# EAGLE board miavita (EAGLE 5.12)
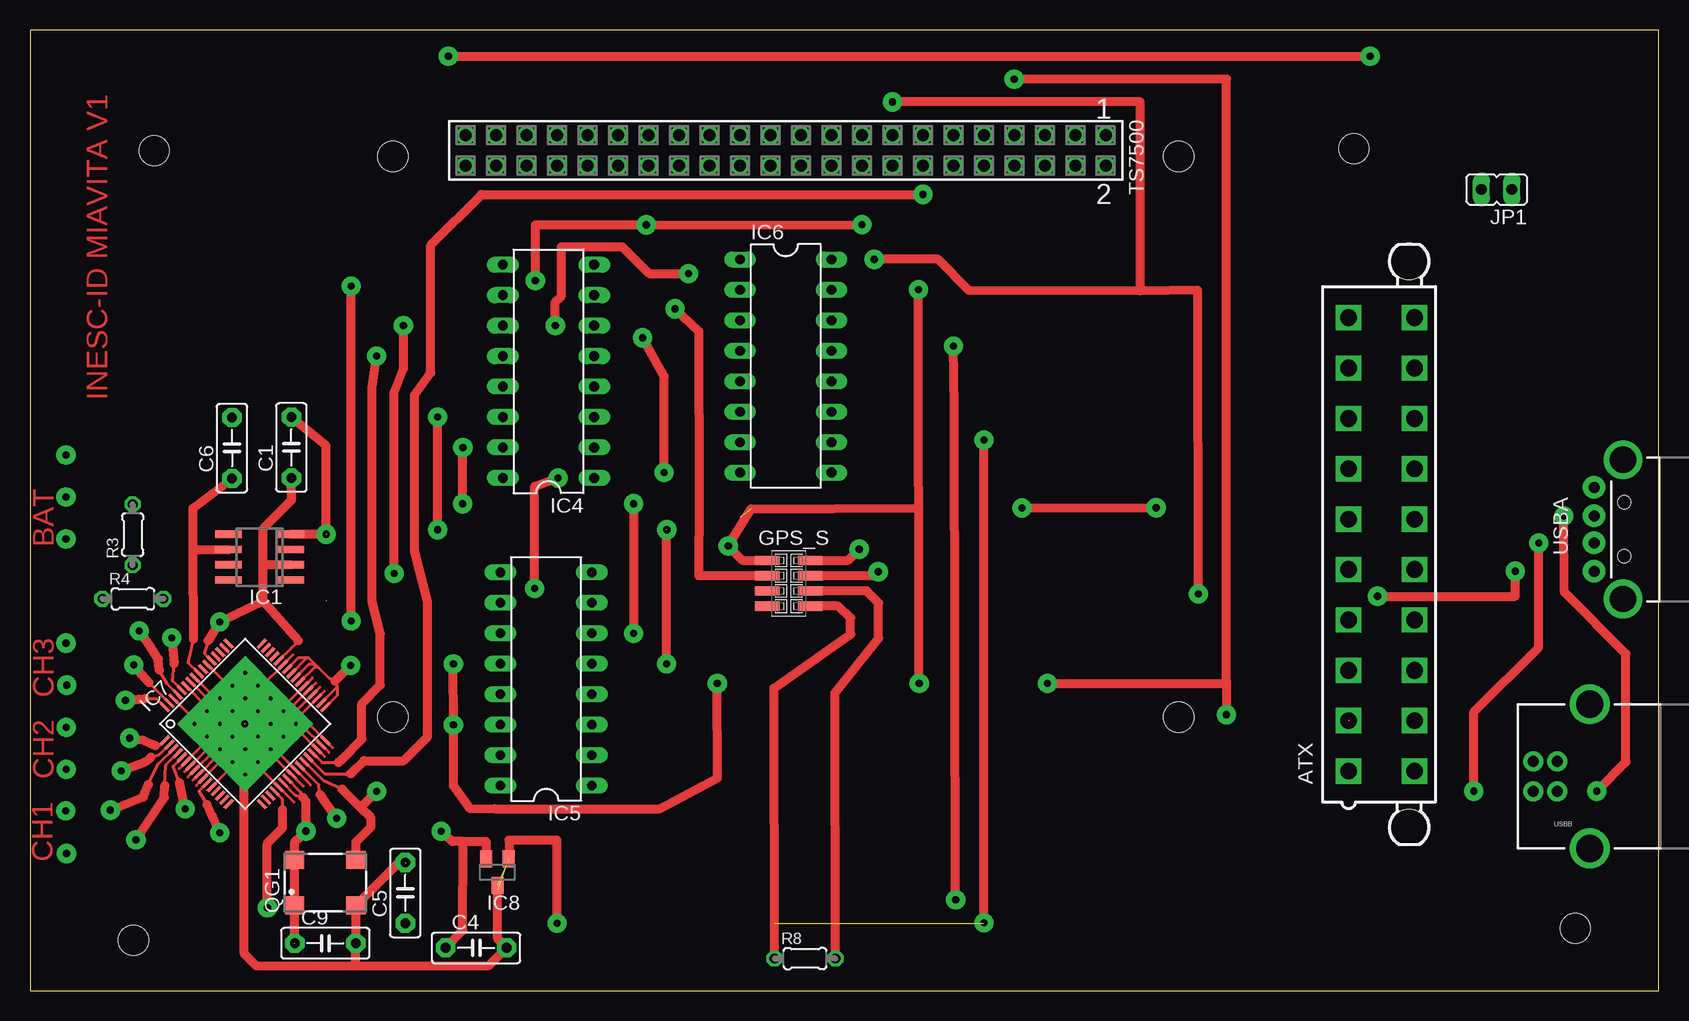
[diagram p0: board, top side]
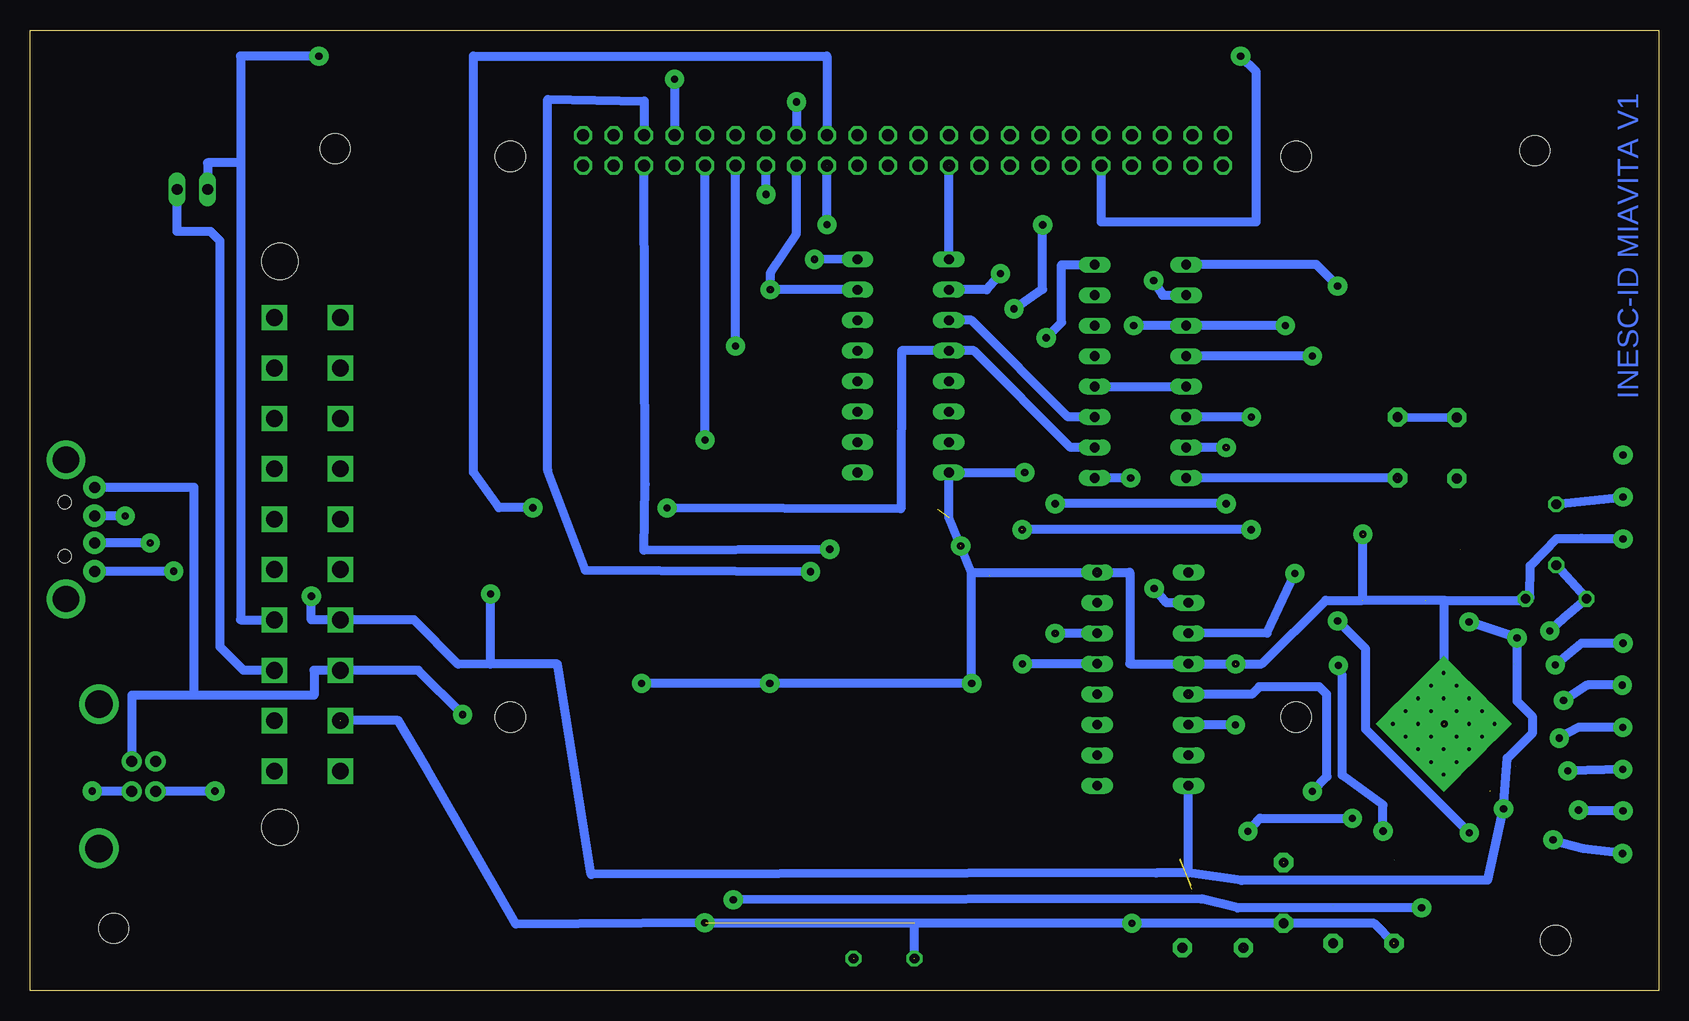
[diagram p1: board, bottom side, seen from below]

Size 135.78 x 80.09 mm. Coordinates in mm from the lower left corner, seen from the top.
Outline: 0,0 135.78,0 135.76,80.09 0,80.09 0,0
Copper layers (1*16): Top 0.035mm / dielectric 1.5mm / Bottom 0.035mm
Design rules "default *": minimum track width 0.75mm, minimum drill 0.5mm, track to track 0.4mm, track to pad 0.4mm, pad to pad 0.4mm, via to via 0.4mm, smd to smd 8mil, copper to edge 40mil, drill to drill 8mil, minimum pad ring 10mil, minimum via ring 0.5mm, stop-mask expansion 0.5mm, vias tented up to drill 0mil, thermal gap 10mil
Holes 2.5 mm at 30.25,69.55 95.75,69.55 95.75,22.8 30.25,22.8 8.62,4.2 128.8,5.2 110.35,70.2 10.35,70.02
tKeepout: area 0,26 to 0,26

## Footprints (pad centres in the part's own frame; a part is rotated, then mirrored left to right if it is on the bottom)
5566-20 = drill 1.4 square: 1 18.9,-2.75; 2 14.7,-2.75; 3 10.5,-2.75; 4 6.3,-2.75; 5 2.1,-2.75; 6 -2.1,-2.75; 7 -6.3,-2.75; 8 -10.5,-2.75; 9 -14.7,-2.75; 10 -18.9,-2.75; 11 18.9,2.75; 12 14.7,2.75; 13 10.5,2.75; 14 6.3,2.75; 15 2.1,2.75; 16 -2.1,2.75; 17 -6.3,2.75; 18 -10.5,2.75; 19 -14.7,2.75; 20 -18.9,2.75 | hole 3: 23.6,2.29; -23.6,2.29
C5B2.5 = drill 0.813 pad 1.6 octagon: 1 -2.54,0; 2 2.54,0
1296-08 = smd 0.76 x 2.05: 1 -1.905,-1.78; 2 -1.905,1.78; 3 -0.635,-1.78; 4 -0.635,1.78; 5 0.635,-1.78; 6 0.635,1.78; 7 1.905,-1.78; 8 1.905,1.78
SO08 = smd 0.6 x 2.2: 1 -1.905,-2.6; 2 -0.635,-2.6; 3 0.635,-2.6; 4 1.905,-2.6; 5 1.905,2.6; 6 0.635,2.6; 7 -0.635,2.6; 8 -1.905,2.6
DIL16 = drill 0.813 long: 1 -8.89,-3.81; 2 -6.35,-3.81; 3 -3.81,-3.81; 4 -1.27,-3.81; 5 1.27,-3.81; 6 3.81,-3.81; 7 6.35,-3.81; 8 8.89,-3.81; 9 8.89,3.81; 10 6.35,3.81; 11 3.81,3.81; 12 1.27,3.81; 13 -1.27,3.81; 14 -3.81,3.81; 15 -6.35,3.81; 16 -8.89,3.81
HTQFP-64-PAP = smd 1 x 0.25: 1 -5.7,3.75; 2 -5.7,3.25; 3 -5.7,2.75; 4 -5.7,2.25; 5 -5.7,1.75; 6 -5.7,1.25; 7 -5.7,0.75; 8 -5.7,0.25; 9 -5.7,-0.25; 10 -5.7,-0.75; 11 -5.7,-1.25; 12 -5.7,-1.75; 13 -5.7,-2.25; 14 -5.7,-2.75; 15 -5.7,-3.25; 16 -5.7,-3.75; 33 5.7,-3.75; 34 5.7,-3.25; 35 5.7,-2.75; 36 5.7,-2.25; 37 5.7,-1.75; 38 5.7,-1.25; 39 5.7,-0.75; 40 5.7,-0.25; 41 5.7,0.25; 42 5.7,0.75; 43 5.7,1.25; 44 5.7,1.75; 45 5.7,2.25; 46 5.7,2.75; 47 5.7,3.25; 48 5.7,3.75 | smd 0.25 x 1: 17 -3.75,-5.7; 18 -3.25,-5.7; 19 -2.75,-5.7; 20 -2.25,-5.7; 21 -1.75,-5.7; 22 -1.25,-5.7; 23 -0.75,-5.7; 24 -0.25,-5.7; 25 0.25,-5.7; 26 0.75,-5.7; 27 1.25,-5.7; 28 1.75,-5.7; 29 2.25,-5.7; 30 2.75,-5.7; 31 3.25,-5.7; 32 3.75,-5.7; 49 3.75,5.7; 50 3.25,5.7; 51 2.75,5.7; 52 2.25,5.7; 53 1.75,5.7; 54 1.25,5.7; 55 0.75,5.7; 56 0.25,5.7; 57 -0.25,5.7; 58 -0.75,5.7; 59 -1.25,5.7; 60 -1.75,5.7; 61 -2.25,5.7; 62 -2.75,5.7; 63 -3.25,5.7; 64 -3.75,5.7 | drill 0.3 pad 2 square: EXP1 -3,3; EXP2 -1.5,3; EXP3 0,3; EXP4 1.5,3; EXP5 3,3; EXP6 -3,1.5; EXP7 -1.5,1.5; EXP8 0,1.5; EXP9 1.5,1.5; EXP10 3,1.5; EXP11 -3,0; EXP12 -1.5,0; EXP13 0,0; EXP14 1.5,0; EXP15 3,0; EXP16 -3,-1.5; EXP17 -1.5,-1.5; EXP18 0,-1.5; EXP19 1.5,-1.5; EXP20 3,-1.5; EXP21 -3,-3; EXP22 -1.5,-3; EXP23 0,-3; EXP24 1.5,-3; EXP25 3,-3
SOT23 = smd 1 x 1.4: 1 -0.95,-1.1; 2 0.95,-1.1; 3 0,1.1
JP1 = drill 0.914 long: 1 0,-1.27; 2 0,1.27
SM77H = smd 1.6 x 1.5: 1 -2.55,-1.9; 2 2.55,-1.9; 3 2.55,1.9; 4 -2.55,1.9
0204/5 = drill 0.813 octagon: 1 -2.54,0; 2 2.54,0
SSW-122-02-S-D = drill 1 pad 1.5 octagon: 1 -26.67,-1.27; 2 -26.67,1.27; 3 -24.13,-1.27; 4 -24.13,1.27; 5 -21.59,-1.27; 6 -21.59,1.27; 7 -19.05,-1.27; 8 -19.05,1.27; 9 -16.51,-1.27; 10 -16.51,1.27; 11 -13.97,-1.27; 12 -13.97,1.27; 13 -11.43,-1.27; 14 -11.43,1.27; 15 -8.89,-1.27; 16 -8.89,1.27; 17 -6.35,-1.27; 18 -6.35,1.27; 19 -3.81,-1.27; 20 -3.81,1.27; 21 -1.27,-1.27; 22 -1.27,1.27; 23 1.27,-1.27; 24 1.27,1.27; 25 3.81,-1.27; 26 3.81,1.27; 27 6.35,-1.27; 28 6.35,1.27; 29 8.89,-1.27; 30 8.89,1.27; 31 11.43,-1.27; 32 11.43,1.27; 33 13.97,-1.27; 34 13.97,1.27; 35 16.51,-1.27; 36 16.51,1.27; 37 19.05,-1.27; 38 19.05,1.27; 39 21.59,-1.27; 40 21.59,1.27; 41 24.13,-1.27; 42 24.13,1.27; 43 26.67,-1.27; 44 26.67,1.27
USB-A-H = drill 0.914 pad 1.88 round: D+ 2.4,1.127; D- 2.4,-1.127; GND 2.4,3.5; VBUS 2.4,-3.5 | drill 2.2 round: GND2 0,-5.8; GND3 0,5.8 | hole 1.1: -0.1,2.25; -0.1,-2.25
USB-B-PTH = drill 0.914 pad 1.676 round: D+ 0,1.25; D- 1.981,1.25; GND 0,-1.25; VBUS 1.981,-1.25 | drill 2.286 round: S1 -2.718,-6.02; S2 -2.718,6.02

## Placement (x,y rotation side)
ATX  5566-20  [5566-20]  112.66,37.2 270 top
C1  1uF  [C5B2.5]  21.79,45.29 90 top
C4  10uF  [C5B2.5]  37.18,3.56 0 top
C5  10uF  [C5B2.5]  31.29,8.14 90 top
C6  10uF  [C5B2.5]  16.84,45.23 90 top
C9  0.1uF  [C5B2.5]  24.62,3.96 0 top
GPS_S  1296-T08  [1296-08]  63.25,33.96 270 top
IC1  REF02D  [SO08]  19.15,36.15 90 top
IC4  4572N  [DIL16]  43.22,51.63 90 top
IC5  74AC590N  [DIL16]  43.02,25.98 90 top
IC6  74LS157N  [DIL16]  63,52.08 270 top
IC7  ADS1278  [HTQFP-64-PAP]  17.94,22.24 45 top
IC8  [SOT23]  38.96,9.88 180 top
JP1  [JP1]  122.26,66.8 90 top
QG1  SM77H  [SM77H]  24.62,9.01 0 top
R3  5k  [0204/5]  8.56,38.01 90 top
R4  1k  [0204/5]  8.57,32.67 0 top
R8  100k  [0204/5]  64.61,2.68 0 top
TS7500  SSW-122-02-S-D  [SSW-122-02-S-D]  63,70.05 180 top
USBA  USB-A-H  [USB-A-H]  132.79,38.46 180 top
USBB  USBPTH  [USB-B-PTH]  127.3,17.88 180 top

## Library data of the parts
ATX = con-molex; OC_FARNELL: unknown; OC_NEWARK: unknown
C1 C4-C6 C9 = capacitor-wima
GPS_S = con-leotronics; OC_FARNELL: unknown; OC_NEWARK: unknown
IC1 = linear
IC4 = 45xx
IC5 IC6 = 74xx-eu
IC7 = texas; MPN: ADS1278IPAPT; OC_FARNELL: 1603419; OC_NEWARK: 50M8811
IC8 = v-reg
JP1 = jumper
QG1 = crystal; OC_FARNELL: unknown; OC_NEWARK: unknown
R3 R4 = rcl
R8 = resistor
TS7500 = con-samtec; MPN: SSW-122-02-S-D; OC_FARNELL: unknown; OC_NEWARK: 11P9673
USBA USBB = SparkFun

## Nets
2.5V: C6.1 IC1.6 IC7.56
+1V8: C4.1 IC7.26 IC8.2
+3V3: ATX.2 C5.1 C9.1 GPS_S.8 IC7.22 IC7.23 IC7.33 IC7.34 IC7.39 IC7.40 IC7.41 IC7.42 IC8.3 QG1.1 QG1.4 R8.1 TS7500.10
+5V: ATX.4 C1.1 IC1.2 IC4.16 IC5.16 IC6.16 IC7.5 IC7.44 IC7.53 IC7.60 TS7500.15 USBA.GND
ADC_DATA: IC7.20 TS7500.12
CONT_144: IC4.3 IC6.3
CONT_RST: IC4.1 IC5.10
DR_INT: IC4.2 IC6.4 TS7500.17
FIRST_ADC_INT: IC4.11 IC5.11 IC6.2
GND: ATX.3 C1.2 C4.2 C5.2 C6.2 C9.2 GPS_S.1 IC1.4 IC4.8 IC5.8 IC5.12 IC5.14 IC6.8 IC6.15 IC7.6 IC7.7 IC7.8 IC7.9 IC7.10 IC7.12 IC7.21 IC7.24 IC7.25 IC7.30 IC7.31 IC7.32 IC7.35 IC7.36 IC7.37 IC7.38 IC7.43 IC7.54 IC7.57 IC7.58 IC7.59 IC7.62 IC8.1 QG1.2 R4.2 TS7500.7 TS7500.16 USBA.VBUS USBB.GND
GPS_PPS: GPS_S.3 IC4.10 TS7500.18
N$1: IC6.1 TS7500.26
N$2: IC4.15 IC5.6
N$3: IC4.14 IC5.5
N$4: IC4.9 IC7.11
N$5: IC4.4 IC4.13
N$6: ATX.14 JP1.2 TS7500.36
N$7: IC4.12 IC7.29
N$8: IC7.3
N$9: ATX.13 JP1.1
N$10: IC7.4
N$11: IC7.1
N$12: IC7.61 R3.1 R4.1
N$13: USBA.D+ USBB.D-
N$14: IC7.63
N$17: IC5.13 IC7.27 QG1.3
N$18: USBA.D- USBB.D+
N$19: R3.2
N$29: IC7.2
N$34: IC7.64
N$42: GPS_S.2 TS7500.6
N$43: GPS_S.4 TS7500.5
N$44: GPS_S.6 R8.2
SPI_CLOCK: IC7.28 TS7500.14

## Tracks (layer width: path | path; a pad name or v marks a point on that pad's centre or on a via)
2.5V  (1 unrouted)
  Top 0.1: IC1.6 16.5,37.05
  Top 0.25: IC7.56 13.2,27.33 13.62,29.3
  Top 0.75: 13.62,29.3 13.6,36.6 | 13.6,36.6 13.6,36.77 IC1.6 | C6.1 13.6,40.22 13.6,36.6
+1V8  (via drill 0.6)  (1 unrouted)
  Top 0.25: IC7.26 24.07,17.17 24.18,16.35
  Top 0.75: 24.18,16.35 24.65,15.65 v25.55,14.38 | v34.27,13.28 35.19,12.44 36.08,12.44 36.09,12.44 | 34.64,3.58 36.08,5.01 36.09,12.44 | IC8.2 38.01,12.44 36.09,12.44
  Bottom 0.75: v34.27,13.28 33.25,14.38 v25.55,14.38
+3V3  (via drill 0.5, 0.6)  (7 unrouted)
  Top 0.1: 22.75,16.07 22.5,16.05
  Top 0.25: 22.57,16.55 IC7.23 | 22.57,16.55 22.75,16.07 22.23,16.23 22.16,16.25 IC7.22 | 22.57,16.55 22.73,16.12 | 25.4,25.8 24.93,26.05 24.02,26.95 | 25.4,25.8 25.66,26.05 | IC7.33 25.6,24.6 25.6,25.31 | 25.6,25.31 IC7.34 | 25.4,25.8 25.6,25.31 | 24.02,26.95 23.78,27.2 23.68,27.2 | IC7.40 23.25,27.2 23.68,27.2 | IC7.39 23.71,26.95 24.02,26.95 | 23.07,27.73 IC7.41 | 23.07,27.73 23.22,27.73 23.68,27.27 23.68,27.2 | IC7.42 22.37,27.73 23.07,27.73
  Top 0.75: 22.75,16.07 22.77,16.07 23,15.8 v23,13.3 22.07,12.43 QG1.4 QG1.1 22.07,3.92 | v26.73,27.12 25.4,25.8 | v79.53,5.66 v79.51,45.9 | v43.93,5.62 43.93,12.53 39.93,12.53 39.93,10.92 | GPS_S.8 67.36,32.05 68.4,31.09 68.4,29.71 62.02,25.2 R8.1
  Bottom 0.75: C9.1 23.73,5.6 C5.1 v43.93,5.62 79.49,5.62 v79.53,5.66 95.28,5.55 102.72,18.54 105.09,22.51 v109.93,22.51 | v23,13.3 23,15.47 26.39,17.96 26.39,26.29 v26.73,27.12 | v79.51,45.9 v79.51,68.75 TS7500.10 | R8.1 62.06,5.6
+5V  (via drill 0.6)  (6 unrouted)
  Top 0.25: IC7.60 11.89,25.82 12,27.25 | IC7.44 21.8,28.58 22.38,29.16 | IC7.5 11.93,18.7 | 12.47,17.32 11.93,18.7 | IC7.53 14.53,28.13 14.85,29.18
  Top 0.75: C1.1 21.8,40.9 19.45,38.52 19.45,35.51 | v12.95,15.15 12.47,17.32 | v11.82,29.4 12,27.25 | 14.85,29.18 v15.82,30.75 19.45,32.5 22.38,29.16 | 19.45,35.51 IC1.2 | 19.45,32.5 19.45,35.51 | v70.38,60.97 75.69,60.97 78.29,58.37 92.55,58.33 | v97.4,33.08 97.35,58.4 92.55,58.33 | v71.89,74.1 92.55,74.1 92.55,58.33 | v112.33,32.88 123.8,32.88 v123.8,34.96
  Bottom 0.75: C1.1 IC4.16 | 39.22,9.81 34.79,9.18 14.27,9.2 12.96,15.11 | 12.96,15.11 v12.95,15.15 | 39.22,9.81 41.9,9.82 89,9.68 91.82,27.22 97.4,27.22 | 39.22,9.81 IC5.16 | 12.96,15.11 12.65,19.37 10.53,21.49 10.53,22.82 11.82,24.12 v11.82,29.4 v15.82,30.75 | IC6.16 v70.39,60.98 | 97.4,27.22 100.08,27.21 103.78,30.91 ATX.4 112.33,30.91 v112.33,32.88 | 97.4,27.22 v97.4,33.08 | v71.89,74.1 TS7500.15 | v123.8,34.96 USBA.GND
ADC_DATA  (via drill 0.6)
  Top 0.25: IC7.20 21.05,15.95 21.05,15.1
  Top 0.75: 21.05,15.1 21.05,13.56 19.79,12.3 v19.79,6.9 | v76.97,53.73 77.06,48.58 v77.16,7.57
  Bottom 0.75: v19.79,6.9 35.11,6.9 38.15,7.65 v77.16,7.57 | v76.97,53.73 TS7500.12
CONT_144
  Bottom 0.75: IC4.3 49.24,47.82 57.31,55.89 IC6.3
CONT_RST  (via drill 0.6)  (2 unrouted)
  Top 0.75: v42.07,33.53 42.07,42.05 v44.02,42.75
  Bottom 0.75: v44.03,42.74 IC4.1 | IC5.10 41.04,32.33 v42.07,33.53
DR_INT  (via drill 0.6)
  Top 0.75: v82.69,40.25 v93.87,40.26
  Bottom 0.75: IC4.2 49.05,45.28 57.12,53.35 IC6.4 63.12,53.35 63.19,40.17 v82.69,40.25 | TS7500.17 69.35,77.91 98.81,77.91 98.81,43.23 96.7,40.26 v93.87,40.26
FIRST_ADC_INT  (via drill 0.6)
  Top 0.75: v31.13,55.45 31.13,51.86 30.35,49.85 v30.35,34.79 | v43.79,55.44 43.78,57.4 44.3,57.92 44.3,62.02 49.37,62.02 51.61,59.78 v54.9,59.78
  Bottom 0.75: IC5.11 32.68,29.8 v30.35,34.79 | v31.13,55.45 IC4.11 v43.79,55.44 | IC6.2 56.04,58.43 v54.9,59.78
GND  (via drill 0.6)  (14 unrouted)
  Top 0.25: 23.1,22.35 23.13,22.35 IC7.32 25.23,20.25 | 24.93,19.85 IC7.31 22.86,21.91 | IC7.30 24.55,19.53 | 22.86,21.91 22.83,21.95 22.8,21.95 22.8,22.05 23.1,22.35 | IC7.30 22.62,21.45 22.3,21.45 | 20.5,24.45 20.4,24.45 20.2,24.65 20.2,24.86 20.19,24.85 20,24.85 | 19.9,25.26 19.9,25.15 19.7,24.95 | 16.6,25.35 IC7.54 | 16.6,25.35 16.6,25.05 16.2,24.65 15.4,24.65 | IC7.62 13.64,22.65 14.1,22.65 | 14.66,23.75 IC7.59 | 14.66,23.75 15.1,23.75 15.37,24.02 | IC7.58 14.97,24.15 15.4,24.15 | IC7.57 15.18,24.65 15.4,24.65 | 15.19,20.55 15.2,20.56 15.2,20.62 | 15.2,20.62 15.2,20.65 | 15.27,19.92 IC7.8 | 15.27,19.92 15.62,19.62 15.65,19.6 | 15.65,19.6 IC7.9 | 15.65,19.6 15.7,19.65 16.1,19.35 16.11,19.35 | 16.11,19.35 IC7.10 | 15.37,24.02 15.4,24.05 | 14.1,22.65 14.4,22.35 14.4,20.47 IC7.6 14.58,20.65 15.21,20.63 15.13,20.62 15.2,20.62 | 14.66,23.75 14.1,23.19 14.1,22.65 | 15.65,19.6 | 16.11,19.35 17.2,19.35 17.3,19.25 17.3,18.65 | 15.19,20.55 IC7.7 | 15.19,20.55 15.2,20.55 15.18,20.65 15.27,19.92 | 15.4,24.15 15.4,24.65 | 16.6,25.35 17,24.95 | 17,24.95 19.4,24.95 | 19.4,24.95 19.4,25.47 IC7.43 21.93,28.01 | 21.08,23.77 20.81,24.05 20.8,24.05 20,24.85 | 21.08,23.77 21.53,23.32 | 21.53,23.32 22,22.86 | 22,22.86 22.27,22.58 | 22.27,22.58 22.51,22.35 23.1,22.35 | 19.83,24.85 19.8,24.85 | IC7.30 22.32,21.75 22.3,21.75 22.46,21.91 22.86,21.91 | IC7.25 23.38,17.15 21.73,18.83 20.81,19.75 20.43,19.75 20.41,19.73 20.4,19.73 20.4,19.43 | IC7.24 22.78,17.05 20.45,19.38 | 20.4,19.43 20.45,19.38 | 20.4,19.43 19.62,18.65 19.3,18.65 | 17.3,18.65 17.87,18.65 19.3,18.65 | 20.45,19.38 20.38,19.38 | 17.92,22.24 17.94,22.24 | 15.4,24.15 15.37,24.12 15.37,24.02
  Top 0.25: 19.7,24.95 19.44,24.95 19.43,24.96 19.39,24.96 19.4,24.95 | 19.7,24.95 19.81,24.84 19.82,24.84 19.83,24.85 | 19.83,24.85 20,24.85 | 17,24.95 17.4,24.55 17.4,22.75 v17.9,22.25 | 17.3,18.65 16.82,18.65 IC7.12 | 22,15.71 IC7.21 19.3,18.41 19.3,18.65 | 24.56,24.97 IC7.35 22.27,22.69 22.27,22.58 | 23.55,26.09 IC7.38 21.24,23.77 21.08,23.77 | 23.82,25.65 IC7.37 21.53,23.36 21.53,23.32 | 24.16,25.28 IC7.36 22,23.12 22,22.86
  Top 0.75: IC1.4 v24.68,38.05 24.68,45.43 C1.2 | 27.16,2.08 C9.2 27.18,3.97 27.18,7.12 30.73,10.68 C5.2 | 27.16,2.08 18.85,2.08 17.87,3.06 17.87,18.65 | 27.16,2.08 38.23,2.08 C4.2 38.98,4.3 38.98,8.45 | 36.69,15.17 35.3,17.07 v35.3,22.16 v35.29,27.25 | v51.07,54.43 52.86,51.22 v52.86,43.19 | v57.29,25.61 57.3,17.72 52.49,15.17 38.71,15.17 36.71,15.18 | v82.05,76 99.73,76 99.73,25.77 99.73,25.62 | 99.73,25.62 v99.73,23.02 | GPS_S.1 59.41,35.86 v58.2,37.06 60.12,40.17 74.05,40.22 | v99.73,23.01 99.77,22.97 | v74.12,25.62 v74.07,58.45 | v84.8,25.62 99.73,25.62
  Bottom 0.1: 17.9,30.69 18,31.05
  Bottom 0.75: v17.9,22.25 17.9,30.69 17.9,32.55 | 2.96,37.7 6.45,37.7 8.52,37.68 10.74,35.41 10.75,32.8 R4.2 11.25,32.55 17.9,32.55 | 17.9,32.55 24.7,32.55 v24.68,38.05 | C1.2 C6.2 | v35.3,22.16 IC5.14 | v35.28,27.25 IC5.12 44.1,27.25 44.1,34.87 IC5.8 57.29,34.85 | IC6.15 v74.07,58.45 74.04,59.89 71.89,63.1 TS7500.16 | IC4.8 49.79,60.52 49.79,55.71 v51.07,54.43 | v52.86,43.19 IC6.8 59.2,39.47 57.29,34.85 | 57.29,34.85 v57.29,25.61 v74.12,25.62 v84.8,25.62 | v82.05,76 TS7500.7 | v99.72,23.01 103.42,26.71 ATX.3 112.1,26.71 112.1,24.63 122.1,24.63 | 122.1,24.63 127.3,24.63 USBB.GND | USBA.VBUS 122.1,41.96 122.1,24.63 | v35.29,27.25 33.11,27.25 27.78,32.55 24.73,32.55
GPS_PPS  (via drill 0.5, 0.6)  (2 unrouted)
  Top 0.75: v42.12,59.2 42.11,63.84 v51.37,63.84 v69.35,63.86 | 55.77,34.6 55.8,41.15 55.77,54.96 v53.76,56.84 | 55.79,34.59 GPS_S.3
  Bottom 0.75: IC4.10 41.36,57.98 v42.12,59.2 | v69.35,63.86 v69.35,68.77 | v51.37,63.84 51.37,58.48 v53.76,56.84
N$1  (1 unrouted)
  Bottom 0.75: IC6.1 TS7500.26
N$2  (via drill 0.6)  (4 unrouted)
  Top 0.75: v36.07,40.6 v36.07,45.3 | v50.32,40.6 v50.32,29.78
  Bottom 0.75: v36.08,45.28 IC4.15 | v36.07,40.6 v50.32,40.6 | IC5.6 v50.32,29.79
N$3  (via drill 0.6)  (4 unrouted)
  Top 0.75: v33.99,38.43 v33.99,47.82 | v53.06,27.25 53.06,38.42
  Bottom 0.75: v33.98,47.82 IC4.14 | v33.99,38.43 v53.08,38.43 | IC5.5 v53.06,27.25
N$4  (via drill 0.6)  (2 unrouted)
  Top 0.25: IC7.11 14.1,16.64 | 14.75,15.53 14.1,16.62
  Top 0.75: 14.75,15.53 15.2,14.55 v15.79,13.16 | v26.78,30.81 v26.78,58.75
  Bottom 0.75: IC4.9 32.54,60.53 28.56,60.53 v26.78,58.75 | v15.8,13.16 24.44,21.8 24.44,28.47 v26.78,30.81
N$5
  Bottom 0.75: 39.44,50.34 46.94,50.34
  Bottom 1: 46.94,50.34 IC4.4 | IC4.13 39.44,50.34
N$6  (via drill 0.5, 0.6)
  Top 0.75: v34.87,77.91 v111.7,77.91
  Bottom 0.75: v34.87,77.91 33.57,76.61 33.57,64.09 46.49,64.09 v46.49,68.74 TS7500.36 | ATX.14 118.23,30.91 118.23,69.01 | v111.7,77.91 118.23,77.91 118.23,69.01 | JP1.2 120.99,69.01 118.23,69.01
N$7  (via drill 0.6)
  Top 0.1: 25.5,19.03 25.5,19.05
  Top 0.25: IC7.29 24.34,19.03 25.5,19.03 25.73,19.03
  Top 0.75: 25.73,19.03 25.73,19.05 26,19.3 27.65,20.95 27.65,23.93 29.2,25.48 29.2,29.76 28.52,32.49 28.52,50.26 v28.89,52.92
  Bottom 0.75: v28.89,52.92 IC4.12
N$8  (via drill 0.6)
  Top 0.25: IC7.3 10.7,18.9 9.86,17.19
  Top 0.75: 9.86,17.19 9.85,17.18 9.57,16.48 9.45,16.15 v6.7,15.05
  Bottom 0.75: v2.99,14.98 6.66,14.98 v6.7,15.05
N$9
  Bottom 0.75: ATX.13 117.97,26.71 119.94,28.67 119.94,62.51 120.73,63.29 123.53,63.29 JP1.1
N$10  (via drill 0.6)
  Top 0.25: IC7.4 11.33,18.8 11.23,17.1
  Top 0.75: 11.23,17.1 11.2,16.1 v8.83,12.57
  Bottom 0.75: v3.04,11.43 6.29,11.83 8.85,12.48 v8.83,12.57
N$11  (via drill 0.6)
  Top 0.25: IC7.1 10.61,20.22 10.47,20.42
  Top 0.75: 10.47,20.42 10.25,20.5 9.4,20.9 v8.3,21.05
  Bottom 0.75: v3.01,21.95 6.67,21.95 8.45,21.05 v8.3,21.05
N$12  (via drill 0.6)
  Top 0.25: IC7.61 11.44,25.56 10.79,26.71
  Top 0.75: 10.79,26.71 10.78,26.73 10.7,27.62 10,28.7 v9.1,30
  Bottom 0.75: 6.05,32.75 6.01,32.71 | 6.05,32.75 R3.1 | 6.05,32.75 6,32.8 R4.1 6.35,32.4 7.9,31.1 v9.1,30
N$13  (via drill 0.6)  (2 unrouted)
  Top 0.75: v120.36,16.63 120.36,23.22 125.76,28.63 v125.76,37.33
  Bottom 0.75: v120.36,16.63 USBB.D- | 125.79,37.33 USBA.D+
N$14  (via drill 0.6)
  Top 0.25: 9.9,25.69 IC7.63
  Top 0.75: 9.9,25.69 9.25,26.4 v8.65,27.15
  Bottom 0.75: 3.01,28.95 6.47,28.95 v8.65,27.15
N$15  (via drill 0.6)
  other vias: 109.89,30.89
N$16  (via drill 0.5)
  other vias: 59.19,68.77
N$17  (via drill 0.6)  (1 unrouted)
  Top 0.25: IC7.27 24.5,17.48 26,16.8
  Top 0.75: 26,16.8 26.02,16.8 27.53,15.3 | QG1.3 27.17,12.4 28.43,13.65 28.43,14.4 27.53,15.3 | v28.89,16.62 27.57,15.3 27.53,15.3
  Bottom 0.75: v28.89,16.62 27.66,17.85 27.69,24.71 28.32,25.34 33.32,25.34 33.95,24.71 IC5.13
N$18  (via drill 0.6)  (2 unrouted)
  Top 0.75: v130.6,16.63 133.03,19.06 133.03,28.09 127.9,33.22 v127.85,39.58
  Bottom 0.75: USBB.D+ v130.6,16.63 | v127.85,39.59 USBA.D-
N$19
  Bottom 0.75: 2.99,41.13 8.55,40.52 8.75,40.55 R3.2
N$20  (via drill 0.5)
  other vias: 69.34,71.32
N$21  (via drill 0.5)
  other vias: 71.92,68.73
N$22  (via drill 0.5)
  other vias: 71.9,71.31
N$23  (via drill 0.6)
  other vias: 109.93,26.71
N$24  (via drill 0.5)
  other vias: 74.45,68.76
N$25  (via drill 0.5)
  other vias: 76.96,68.78
N$26  (via drill 0.5)
  other vias: 82.07,71.3
N$27  (via drill 0.5)
  other vias: 84.62,71.31
N$28  (via drill 0.5)
  other vias: 84.61,68.75
N$29  (via drill 0.6)
  Top 0.25: IC7.2 10.8,19.7 10.1,19.45
  Top 0.75: 10.1,19.45 9.55,19.05 v7.6,18.33
  Bottom 0.75: v3.02,18.44 7.51,18.31 v7.6,18.33
N$30  (via drill 0.6)
  other vias: 3,41.16
N$31  (via drill 0.6)
  other vias: 3,37.66
N$32  (via drill 0.6)
  other vias: 3,44.66
N$33  (via drill 0.6)
  other vias: 3,28.96
N$34  (via drill 0.6)
  Top 0.25: IC7.64 10.53,24.35 9.6,24.35
  Top 0.75: 9.6,24.35 9.1,24.3 8.65,24.25 v7.95,24.2
  Bottom 0.75: v3.06,25.47 5.97,25.48 v7.95,24.2
N$35  (via drill 0.6)
  other vias: 115.39,26.71
N$36  (via drill 0.6)
  other vias: 115.4,30.91
N$42  (via drill 0.6)
  Top 0.75: GPS_S.2 68.18,35.86 v69.12,36.8
  Bottom 0.75: TS7500.6 84.51,42.22 84.6,36.7 v69.12,36.8
N$43  (via drill 0.6)
  Top 0.75: GPS_S.4 70.38,34.59 v70.71,34.92
  Bottom 0.75: TS7500.5 84.59,74.16 92.63,74.32 92.63,43.38 89.48,35.04 v70.71,34.92
N$44  (1 unrouted)
  Top 0.75: GPS_S.6 69.74,33.32 70.74,32.32 70.74,29.37 67.1,24.81 R8.2
S$1
  Top 0.25: 12.42,18.5 12.9,18.97
S$2
  Top 0.25: 13.27,18.63 12.89,18.25
S$3
  Top 0.25: 13.87,17.11 14.25,17.49
S$4
  Top 0.25: 13.58,17.53 13.9,17.85
S$5
  Top 0.25: 13.51,18.17 13.15,17.81
SPI_CLOCK  (via drill 0.6)
  Top 0.25: IC7.28 24.58,18.07 26.73,18.07
  Top 0.75: 26.73,18.07 26.75,18.1 26.77,18.1 27.85,19.18 31.12,19.18 33.12,21.18 33.13,32.47 32.06,36.64 32.06,49.64 33.4,51.5 33.4,62.14 37.64,66.38 v74.43,66.38
  Bottom 0.75: v74.43,66.38 TS7500.14

## Text on the board
Top: INESC-ID MIAVITA V1 | BAT | CH3 | CH2 | CH1
Bottom: INESC-ID MIAVITA V1